# EAGLE board Dial (EAGLE 9.5.2)
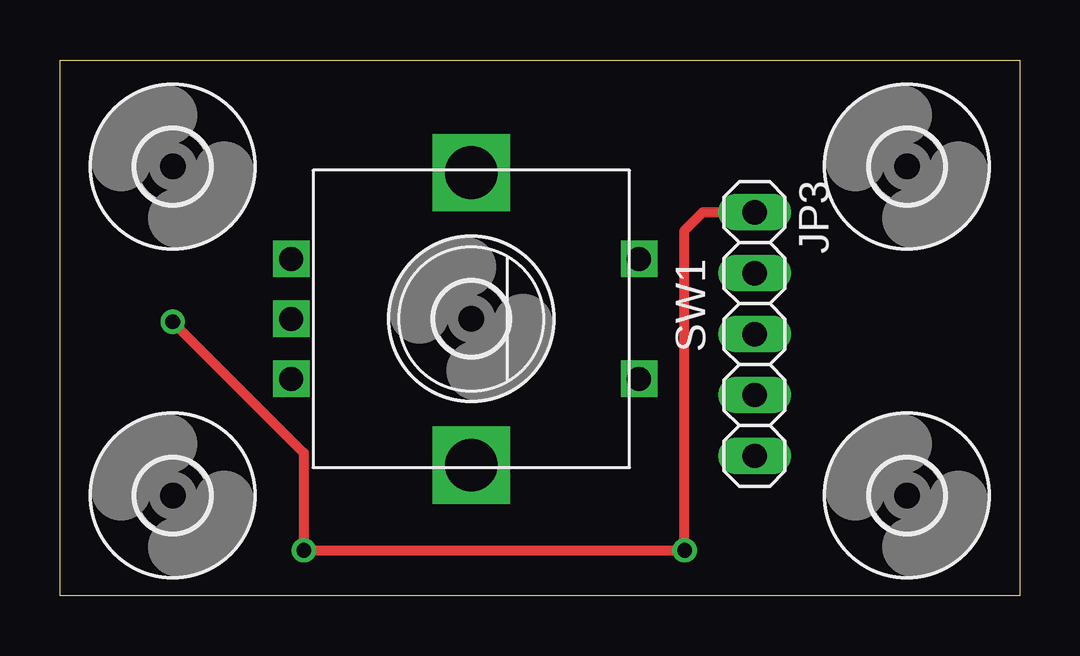
[diagram p0: board, top side]
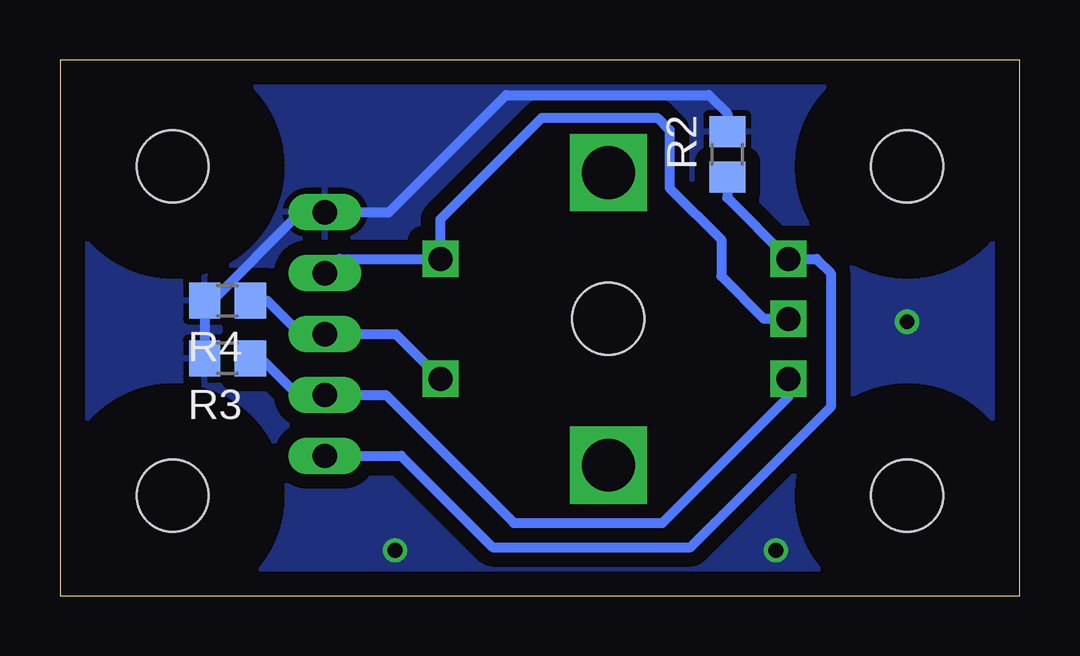
[diagram p1: board, bottom side, seen from below]

Size 40.01 x 22.35 mm. Coordinates in mm from the lower left corner, seen from the top.
Outline: 40.01,22.35 40.01,0 0,0 0,22.35 40.01,22.35
Copper layers (1*16): Top 0.035mm / dielectric 1.5mm / Bottom 0.035mm
Design rules "default": minimum track width 10mil, minimum drill 24mil, track to track 8mil, track to pad 8mil, pad to pad 8mil, via to via 8mil, smd to smd 8mil, copper to edge 40mil, drill to drill 8mil, minimum pad ring 10mil, minimum via ring 8mil, stop-mask expansion 4mil, vias tented up to drill 0mil, thermal gap 10mil

## Footprints (pad centres in the part's own frame; a part is rotated, then mirrored left to right if it is on the bottom)
3,0 = hole 3: 0,0
1X05 = drill 1.016 long: 1 -5.08,0; 2 -2.54,0; 3 0,0; 4 2.54,0; 5 5.08,0
R0805 = smd 1.3 x 1.5: 1 -0.95,0; 2 0.95,0
ALPS_EC12E_SW = drill 1 square: A -2.5,-7.5; B 2.5,-7.5; C 0,-7.5; D -2.5,7; E 2.5,7 | drill 2.2 square: GND1 -6.1,0; GND2 6.1,0

## Placement (x,y rotation side)
H1  MOUNT-HOLE3.0  [3,0]  4.7,17.91 270 top
H2  MOUNT-HOLE3.0  [3,0]  35.31,4.19 270 top
H3  MOUNT-HOLE3.0  [3,0]  35.31,17.91 270 top
H4  MOUNT-HOLE3.0  [3,0]  17.14,11.56 270 top
H5  MOUNT-HOLE3.0  [3,0]  4.7,4.19 270 top
JP3  [1X05]  28.96,10.92 270 top
R2  10K  [R0805]  12.19,18.41 90 bottom
R3  10K  [R0805]  33.02,9.91 180 bottom
R4  10K  [R0805]  33.02,12.32 180 bottom
SW1  EC12E_SW  [ALPS_EC12E_SW]  17.14,11.56 270 top

## Library data of the parts
H1-H5 = holes
JP3 = pinhead
R2-R4 = rcl
SW1 = switch-alps; MPN: EC12E2424407; OC_FARNELL: 1520813; OC_NEWARK: 74M1068

## Nets
+3V3: JP3.2 SW1.C SW1.D
GND: JP3.1 R2.2 R3.2 R4.2
N$1: JP3.4 R3.1 SW1.B
N$2: JP3.5 R2.1 SW1.A
N$3: JP3.3 R4.1 SW1.E

## Tracks (layer width: path | path; a pad name or v marks a point on that pad's centre or on a via)
+3V3
  Bottom 0.406: SW1.C 10.66,11.56 12.44,13.34 12.44,14.86 14.6,17.02 14.6,19.43 15.11,19.94 19.91,19.94 24.14,15.71 SW1.D 28.36,14.06 JP3.2
GND  (via drill 0.61)
  Top 0.406: JP3.1 26.8,16 26.04,15.24 v26.04,1.91 v10.16,1.91 10.16,5.97 v4.7,11.43
  Bottom 0.254: 33.81,12.16 R4.2
  Bottom 0.406: R2.2 12.19,20.13 12.95,20.89 21.4,20.89 26.29,16 JP3.1 29.97,16 33.81,12.16 | R4.2 R3.2
  pour Bottom (isolate 0.61): 39.75,22.1 39.75,0.13 0.25,0.13 0.25,22.1
N$1
  Bottom 0.406: SW1.B 9.65,8.29 14.89,3.05 21.08,3.05 26.42,8.38 JP3.4 30.1,8.38 31.62,9.91 R3.1
N$2
  Bottom 0.406: R2.1 12.19,16.6 SW1.A 8.47,14.06 7.87,13.46 7.87,7.87 13.72,2.03 21.97,2.03 25.78,5.84 JP3.5
N$3
  Bottom 0.406: SW1.E 26.01,10.92 JP3.3 29.97,10.92 31.37,12.32 R4.1